# Altium PCB SAAT_PCB.PcbDoc
Units mm, origin at the board's own origin, x right, y up, seen from the top; angles counter-clockwise.
Board outline 229.87 x 73.66 mm, 2 copper layers (Top Layer, Bottom Layer), stack 1.58 mm thick; 83 components, 122 nets, 357 pads, 70 vias.
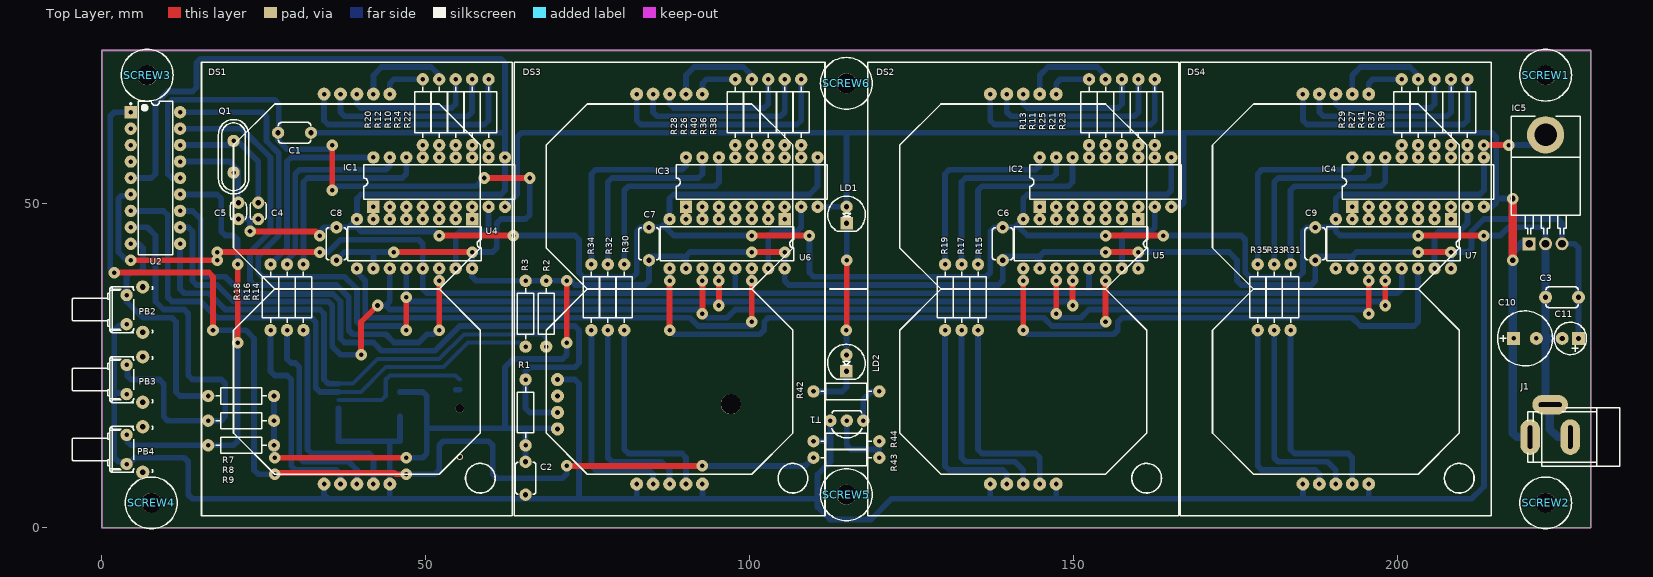
[diagram p0: Top Layer view]
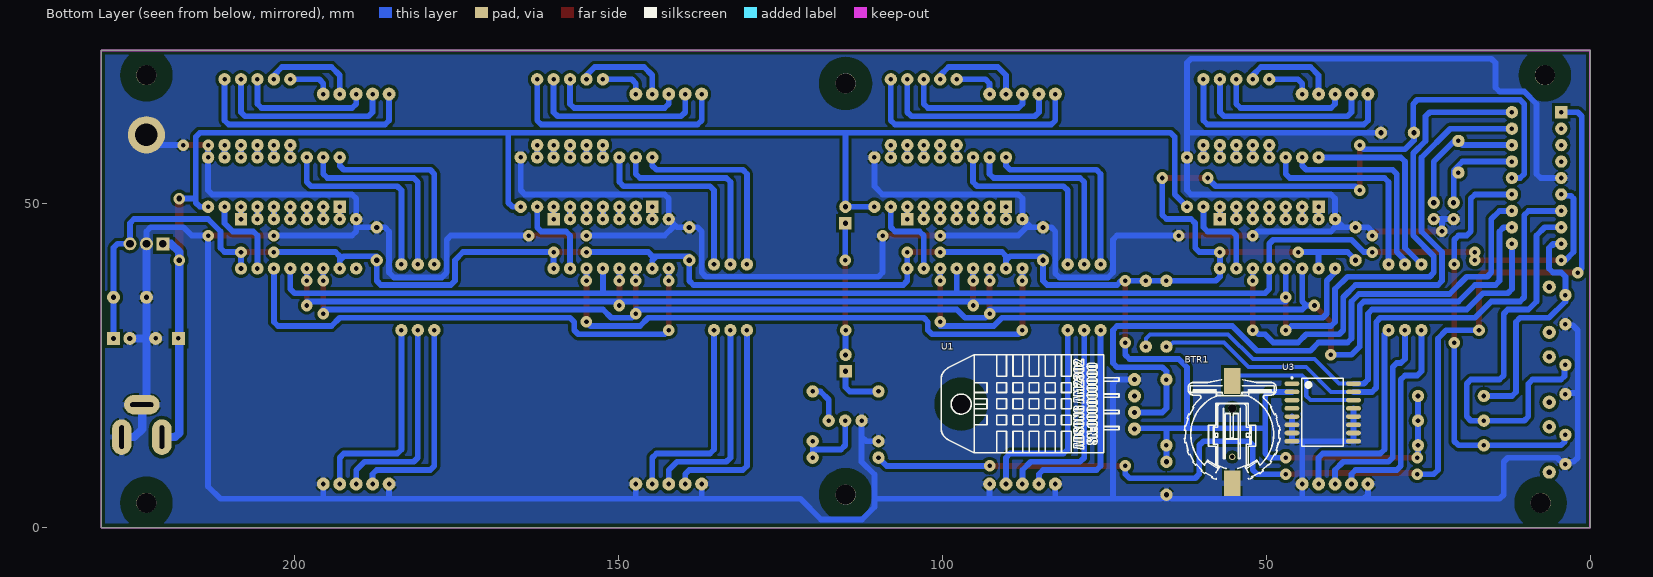
[diagram p1: Bottom Layer view, seen from below]
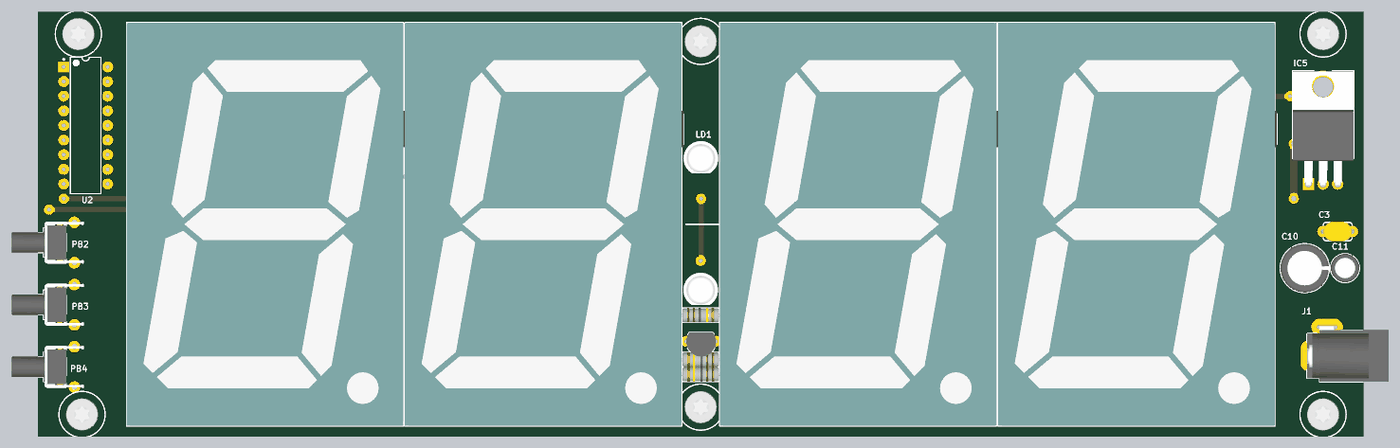
[diagram p2: 3D render of the assembled board from above, using the file's embedded part models]
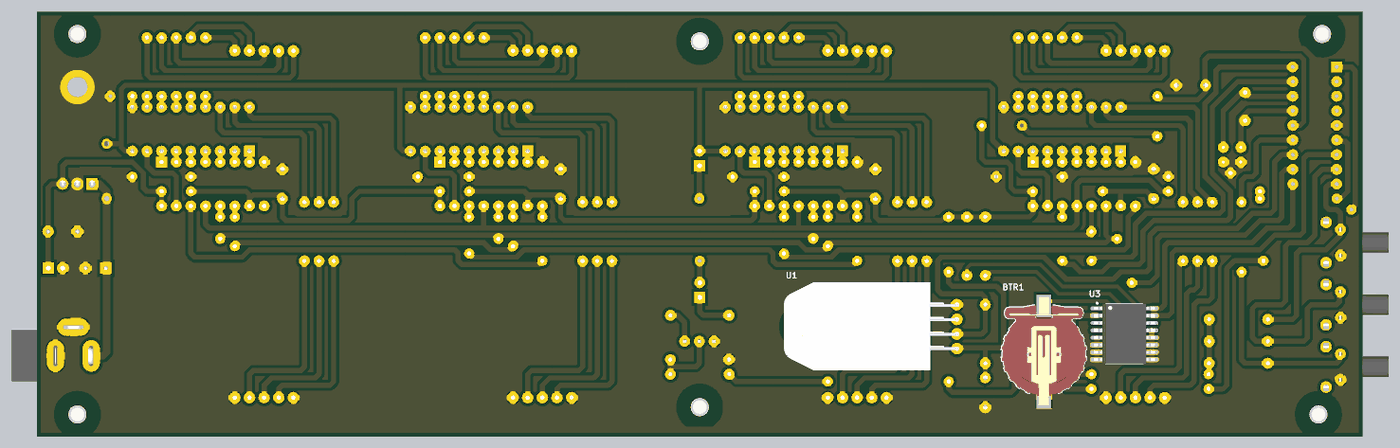
[diagram p3: 3D render of the assembled board from below, using the file's embedded part models]

## Layer stack, top to bottom
Top Solder: solder mask 0.0102, Solder Resist, Dk 3.5
Top Layer: signal copper 0.0356
Dielectric 1: dielectric 1.5086, FR-4, Dk 4.8
Bottom Layer: signal copper 0.0356
Bottom Solder: solder mask 0.0102, Solder Resist, Dk 3.5

## Board outline
0,0 0,73.66 229.87,73.66 229.87,0

## Design rules (kind name [scope] priority, off if disabled: settings)
Clearance Vida [AsMM(PadXSize_AllLayers)=3.1 vs InPolygon] p1: gap=2.54 ignorepadtopadclearanceinfootprint=FALSE
Clearance Polygon [InPolygon] p2: gap=0.508 ignorepadtopadclearanceinfootprint=FALSE
Clearance [All] p3: gap=0.254 ignorepadtopadclearanceinfootprint=FALSE except(0: Arc-Hole Track-Hole SMDPad-Hole THPad-Hole Via-Hole Fill-Hole Poly-Hole Region-Hole Text-Hole)
ComponentClearance [All] p1: gap=-254 collisioncheckmode=3 verticalgap=2540 showdistances=FALSE
HoleSize [All] p1: absolutevalues=TRUE maxlimit=5 minlimit=0.025 maxpercent=80.000 minpercent=20.000
PolygonConnect 7805 [HasFootprint('TO-220-H') vs InNet('GND')] p1: connectstyle=Direct reliefconductorwidth=0.889 reliefentries=4 polygonreliefangle="90 Angle" airgapwidth=0.254
PolygonConnect [All] p2: connectstyle=Relief reliefconductorwidth=0.889 reliefentries=4 polygonreliefangle="90 Angle" airgapwidth=0.254
RoutingVias [All] p1: holewidth=0.9 width=1.778 viastyle="Through Hole" minholewidth=0.9 minwidth=1.778 maxholewidth=0.9 maxwidth=1.778
SolderMaskExpansion [All] p1: expansion=0.102 istentingtop=FALSE
Width [All] p1: maxlimit=7.62 minlimit=0.254 preferedwidth=0.889 minimp=50.000000 maximp=50.000000 favimp=50.000000
28 further rules are at their usual default settings.

## Classes and differential pairs
component class Display: C6 C7 C8 C9 DS1 DS2 DS3 DS4 IC1 IC2 IC3 IC4 LD1 LD2 R10 R11 R12 R13 R14 R15 R16 R17 R18 R19 R20 R21 R22 R23 R24 R25 R26 R27 R28 R29 R30 R31 R32 R33 R34 R35 R36 R37 R38 R39 R40 R41 R42 R43 R44 T1 U4 U5 U6 U7
component class CPU: BTR1 C1 C2 C3 C4 C5 C10 C11 IC5 J1 PB2 PB3 PB4 Q1 R1 R2 R3 R7 R8 R9 SCREW1 SCREW2 SCREW3 SCREW4 SCREW5 SCREW6 U1 U2 U3

## Components (designator, comment, footprint, x,y, rotation, side; value= is the part's Value field where it differs from the comment)
BTR1 "CR2032 Battery" cr1220 55.245,14.415 r270 bottom
C1 "100nF" CAPRR508-350X500X500#1 29.739,60.96 r0 top
C2 "100nF" CAPRR508-350X500X500#1 65.405,7.62 r90 top
C3 "100nF" CAPRR508-350X500X500#2 225.425,35.56 r0 top
C4 "22pF" CAPRR254-254X381X381 24.13,48.895 r90 top
C5 "22pF" CAPRR254-254X381X381 21.061,48.895 r90 top
C6 "100nF" CAPRR508-350X500X500#1 139.065,43.815 r90 top
C7 "100nF" CAPRR508-350X500X500#1 84.455,43.815 r90 top
C8 "100nF" CAPRR508-350X500X500#1 36.195,43.815 r90 top
C9 "100nF" CAPRR508-350X500X500#1 187.325,43.815 r90 top
C10 "470uF" CAPPR350-850X1300 219.71,29.21 r0 top
C11 "47uF" CAPPR250-500X1100 226.695,29.21 r180 top
DS1 "57mm Display" "57mm 7 Segment" 39.37,36.83 r0 top locked
DS2 "57mm Display" "57mm 7 Segment" 142.24,36.83 r0 top locked
DS3 "57mm Display" "57mm 7 Segment" 87.63,36.83 r0 top locked
DS4 "57mm Display" "57mm 7 Segment" 190.5,36.83 r0 top locked
IC1 "UDN2981A-T" DIP18-300 52.07,53.34 r90 top
IC2 "UDN2981A-T" DIP18-300 154.94,53.34 r90 top
IC3 "UDN2981A-T" DIP18-300 100.33,53.34 r90 top
IC4 "UDN2981A-T" DIP18-300 203.2,53.34 r90 top
IC5 "LM7805CT" TO-220-H 222.885,43.815 r0 top
J1 "Jack" CLIFF_FC68148(DC-10A) 226.695,13.97 r90 top
LD1 "IR" LED_VISHAY_TSAL6200 114.97,48.26 r90 top
LD2 "IR" LED_VISHAY_TSAL6200 114.935,25.4 r90 top
PB2 "Push Button" PB_TYCO_1-1825027-1 3.81,33.655 r0 top
PB3 "Push Button" PB_TYCO_1-1825027-1 3.81,22.86 r0 top
PB4 "Push Button" PB_TYCO_1-1825027-1 3.81,12.065 r0 top
Q1 "20MHz" XTAL_HC-49/U 20.32,57.256 r270 top
R1 "4k7" RES1016-630X250 65.405,17.78 r270 top
R2 "10k" RES1016-630X250 68.58,33.02 r90 top
R3 "10k" RES1016-630X250 65.405,33.02 r90 top
R7 "10k" RES1016-630X250 21.484,20.32 r0 top
R8 "10k" RES1016-630X250 21.484,16.51 r0 top
R9 "10k" RES1016-630X250 21.484,12.7 r0 top
R10 "180" RES1016-630X250 52.07,64.135 r90 top
R11 "180" RES1016-630X250 154.94,64.135 r90 top
R12 "180" RES1016-630X250 49.53,64.135 r90 top
R13 "180" RES1016-630X250 152.4,64.135 r90 top
R14 "180" RES1016-630X250 31.115,35.56 r270 top
R15 "180" RES1016-630X250 135.255,35.56 r270 top
R16 "180" RES1016-630X250 28.575,35.56 r270 top
R17 "180" RES1016-630X250 132.715,35.56 r270 top
R18 "180" RES1016-630X250 26.035,35.56 r270 top
R19 "180" RES1016-630X250 130.175,35.56 r270 top
R20 "180" RES1016-630X250 57.15,64.135 r90 top
R21 "180" RES1016-630X250 160.02,64.135 r90 top
R22 "180" RES1016-630X250 59.69,64.135 r90 top
R23 "180" RES1016-630X250 162.56,64.135 r90 top
R24 "360" RES1016-630X250 54.61,64.135 r90 top
R25 "360" RES1016-630X250 157.48,64.135 r90 top
R26 "180" RES1016-630X250 100.33,64.135 r90 top
R27 "180" RES1016-630X250 203.2,64.135 r90 top
R28 "180" RES1016-630X250 97.79,64.135 r90 top
R29 "180" RES1016-630X250 200.66,64.135 r90 top
R30 "180" RES1016-630X250 80.645,35.56 r270 top
R31 "180" RES1016-630X250 183.515,35.56 r270 top
R32 "180" RES1016-630X250 78.105,35.56 r270 top
R33 "180" RES1016-630X250 180.975,35.56 r270 top
R34 "180" RES1016-630X250 75.565,35.56 r270 top
R35 "180" RES1016-630X250 178.435,35.56 r270 top
R36 "180" RES1016-630X250 105.41,64.135 r90 top
R37 "180" RES1016-630X250 208.28,64.135 r90 top
R38 "180" RES1016-630X250 107.95,64.135 r90 top
R39 "180" RES1016-630X250 210.82,64.135 r90 top
R40 "360" RES1016-630X250 102.87,64.135 r90 top
R41 "360" RES1016-630X250 205.74,64.135 r90 top
R42 "11k" RES1016-630X250 114.935,21.025 r180 top
R43 "1k" RES1016-630X250 114.935,10.795 r0 top
R44 "10k" RES1016-630X250 114.935,13.335 r0 top
SCREW1 "M3x6" BOSSARD_BN5687-3061605_v 222.885,69.85 r0 top
SCREW2 "M3x6" BOSSARD_BN5687-3061605_v 222.885,3.81 r0 top
SCREW3 "M3x6" BOSSARD_BN5687-3061605_v 6.985,69.85 r0 top
SCREW4 "M3x6" BOSSARD_BN5687-3061605_v 7.62,3.81 r0 top
SCREW5 "M3x6" BOSSARD_BN5687-3061605_v 114.935,5.08 r0 top
SCREW6 "M3x6" BOSSARD_BN5687-3061605_v 114.935,68.58 r0 top
T1 "BC337" TO-92AA-P254 115.005,16.51 r180 top
U1 "DHT22" DHT22_HOR 83.714,19.05 r90 bottom
U2 "PIC16F88-I/P" PDIP300-P18 8.255,53.975 r0 top
U3 "DS3231" SOIC16W 41.275,17.78 r180 bottom
U4 "M54HC595F1R" DIP16 48.26,43.815 r180 top
U5 "M54HC595F1R" DIP16 151.13,43.815 r180 top
U6 "M54HC595F1R" DIP16 96.52,43.815 r180 top
U7 "M54HC595F1R" DIP16 199.39,43.815 r180 top

## Footprints (in the part's own frame and the unit in brackets; to place one, negate y for a bottom-side part, rotate by r counter-clockwise, add the part's x,y. Pads: shape width x height; smd on the part's side, far side on the other; paste and mask are expansions set on the pad)
"57mm 7 Segment" [mm] "57mm 7 Segment Display"
  round 2 hole 0.7: 1(-5.08,-30.1) 2(-2.54,-30.1) 3(0,-30.1) 4(2.54,-30.1) 5(5.08,-30.1) 6(5.08,30.1) 7(2.54,30.1) 8(0,30.1) 9(-2.54,30.1) 10(-5.08,30.1)
  silkscreen extent -24,-35 24,35, body extent -24,-35 24,35, height 15
BOSSARD_BN5687-3061605_v [mm] "M3 L=6mm Hexalobular Socket Pan Head Screw, Fully Threaded - Stainless Steel A2"
  silkscreen extent -4,-4 4,4, body extent -2.8,-2.8 2.8,2.8, height 2.4
CAPPR250-500X1100 [mm] "Capacitor, Radial, Pin spacing 2.5mm - Body Diameter 5.0mm X Body Height 11mm"
  rect 2x2 hole 0.8: 1(-1.25,0)
  round 2 hole 0.8: 2(1.25,0)
  silkscreen extent -2.5,-2.5 2.5,2.5, body extent -2.51,-2.51 2.49,2.49, height 10.9
CAPPR350-850X1300 [mm] "Capacitor, Radial, Pin spacing 3.5mm - Body Diameter 8.5mm x Body Height 13mm"
  rect 2x2 hole 0.7: 1(-1.75,0)
  round 2 hole 0.7: 2(1.75,0)
  silkscreen extent -4.25,-4.25 4.25,4.25, body extent -4.25,-4.25 4.25,4.25, height 13
CAPRR254-254X381X381 [mm] "Capacitor Radial Rounded, Pin spacing 2.54mm - Body With 2.54mm X Body Length 3.81mm X Body Height 3.81mm"
  round 1.905 hole 0.8: 1(-1.27,0) 2(1.27,0)
  silkscreen extent -1.35,-1.27 1.35,1.27, body extent -1.9,-1.27 1.91,1.27, height 3.81
CAPRR508-350X500X500#1 [mm] "Capacitor Radial Rounded, Pin spacing 5.08mm - Body With 3.2mm X Body Length 5.0mm X Body Height 5.0mm"
  round 1.905 hole 0.8: 1(-2.54,0) 2(2.54,0)
  silkscreen extent -2.5,-1.6 2.5,1.6, body extent -2.79,-1.75 2.79,1.75, height 5
CAPRR508-350X500X500#2 [mm] "Capacitor Radial Rounded, Pin spacing 5.08mm - Body With 3.2mm X Body Length 5.0mm X Body Height 5.0mm"
  round 2 hole 0.8: 1(-2.54,0) 2(2.54,0)
  silkscreen extent -2.5,-1.6 2.5,1.6, body extent -2.79,-1.75 2.79,1.75, height 5
CLIFF_FC68148(DC-10A) [mm] "12V /  5A, 2.1mm Diameter Pin, DC Power Socket With  Switch. DC10A Type"
  rrect100% 5.5x3 hole 0.7 slot 3.6 at 0 deg: 1(0,6.2) 3(0,0)
  rrect100% 3x5.5 hole 0.7 slot 3.6 at 90 deg: 2(5,3.1)
  silkscreen extent -4.5,-7.6 4.5,6.6, body extent -4.5,-7.6 5.2,6.6, height 11
cr1220 [mm]
  rect 4x2.6 smd: 1(-8.23,0) 2(7.57,0)
  round 1.3 hole 1.3: 3(-4,0)
  round 1 hole 0.7: 4(3.5,0)
  silkscreen extent -8.39,-7.38 6.97,7.37, body extent -9.79,-7.34 9.01,7.41, height 4.26
DHT22_HOR [mil] "Dht22 Am2302 Horizontal"
  round 80 hole 30: 1(-150,-526.82) 2(-50,-526.82) 3(50,-526.82) 4(150,-526.82)
  round 122.05 hole 122.05: ""(0.63,526.82)
  silkscreen extent -295,-433 300,649, body extent -300,-536 294,649, height 316
DIP16 [mm] "DIP; 16 Leads; Row Spacing 7.62 mm; Pitch 2.54 mm"
  rect 1.905x1.905 hole 0.7: 1(-8.89,-3.81)
  round 1.905 hole 0.7: 2(-6.35,-3.81) 3(-3.81,-3.81) 4(-1.27,-3.81) 5(1.27,-3.81) 6(3.81,-3.81) 7(6.35,-3.81) 8(8.89,-3.81) 9(8.89,3.81) 10(6.35,3.81) 11(3.81,3.81) 12(1.27,3.81) 13(-1.27,3.81) 14(-3.81,3.81) 15(-6.35,3.81) 16(-8.89,3.81)
  silkscreen extent -10.3,-2.65 10.3,2.65
DIP18-300 [mm] "DIP 18 Leads, Row Spacing 7.62 mm; Pitch 2.54 mm"
  rect 1.905x1.905 hole 0.7: 1(-3.81,10.16)
  round 1.905 hole 0.7: 2(-3.81,7.62) 3(-3.81,5.08) 4(-3.81,2.54) 5(-3.81,0) 6(-3.81,-2.54) 7(-3.81,-5.08) 8(-3.81,-7.62) 9(-3.81,-10.16) 10(3.81,-10.16) 11(3.81,-7.62) 12(3.81,-5.08) 13(3.81,-2.54) 14(3.81,0) 15(3.81,2.54) 16(3.81,5.08) 17(3.81,7.62) 18(3.81,10.16)
  silkscreen extent -2.65,-11.69 2.65,11.69, body extent -3.93,-11.68 3.94,11.69, height 5.33
LED_VISHAY_TSAL6200 [mm] "5mm Infrared Emitting Diode, VISHAY TSAL"
  rect 1.905x1.905 hole 0.8: 1(-1.27,0)
  round 1.905 hole 0.8: 2(1.27,0)
  silkscreen extent -2.5,-2.9 2.9,2.9, body extent -2.5,-2.9 2.9,2.9, height 13.7
PB_TYCO_1-1825027-1 [mm] "Right Angle Micro Miniature Tactile Pushbutton Switche, Round Actuator Length = 5.74mm, FSMRAJ Serie"
  round 1.905 hole 0.7: 1(0,-2.25) 2(0,2.25)
  round 2.032 hole 0.889: 3(2.49,-3.505) 4(2.49,3.505)
  silkscreen extent -8.36,-3.56 4,3.56, body extent -8.36,-4.2 4,4.2, height 7.01
PDIP300-P18 [mm] "DIP, 18-Leads, Row Spacing 7.62mm, Pitch 2.54mm, Body 22.9x6.6mm"
  rect 1.905x1.905 hole 0.7: 1(-3.81,10.16)
  round 1.905 hole 0.7: 2(-3.81,7.62) 3(-3.81,5.08) 4(-3.81,2.54) 5(-3.81,0) 6(-3.81,-2.54) 7(-3.81,-5.08) 8(-3.81,-7.62) 9(-3.81,-10.16) 10(3.81,-10.16) 11(3.81,-7.62) 12(3.81,-5.08) 13(3.81,-2.54) 14(3.81,0) 15(3.81,2.54) 16(3.81,5.08) 17(3.81,7.62) 18(3.81,10.16)
  silkscreen extent -3.93,-11.85 2.65,11.85, body extent -3.6,-11.8 3.6,11.8, height 5.34
RES1016-630X250 [mm] "Resistor, Axial, Pad spacing 10.16 mm - Body Lengh 6.3mm X Body Diameter 2.5mm"
  round 1.905 hole 0.7: 1(-5.08,0) 2(5.08,0)
  silkscreen extent -3.95,-1.25 3.95,1.25, body extent -5.38,-1.27 5.38,1.26, height 2.51
SOIC16W [mm]
  oval 2.3x0.7 smd: 1(-4.75,4.445) 2(-4.75,3.175) 3(-4.75,1.905) 4(-4.75,0.635) 5(-4.75,-0.635) 6(-4.75,-1.905) 7(-4.75,-3.175) 8(-4.75,-4.445) 9(4.75,-4.445) 10(4.75,-3.175) 11(4.75,-1.905) 12(4.75,-0.635) 13(4.75,0.635) 14(4.75,1.905) 15(4.75,3.175) 16(4.75,4.445)
  silkscreen extent -4.87,-5.25 3.2,5.47, body extent -5.31,-5.25 5.32,5.25, height 2.62
TO-92AA-P254 [mm] "TO-92 (TO226), Pitch 2.54mm, Flat Index, 3 In-Line, Bent Leads, Body Dia. 5.3mm"
  round 1.905 hole 0.7: 1(-2.54,0) 2(0,0) 3(2.54,0)
  silkscreen extent -2.36,-1.53 2.37,2.66, body extent -2.81,-1.53 2.81,2.64, height 9.33
TO-220-H [mm] "TO-220 3-Terminal + Tab - Horizontal Mount"
  rect 2x2 hole 1.2: 1(-2.54,0)
  round 2 hole 1.2: 2(0,0) 3(2.54,0)
  round 5.75 hole 3.5: 4(0,16.828)
  silkscreen extent -5.33,1.5 5.33,19.7, body extent -5.27,-0.28 5.27,19.49, height 4.7
XTAL_HC-49/U [mm] "HC-49/U Leaded Cristal, Body 11.05x4.8mm; Pitch 4.88mm"
  round 1.905 hole 0.7: 1(-2.44,0) 2(2.44,0)
  silkscreen extent -5.75,-2.33 5.75,2.33, body extent -5.75,-2.33 5.75,2.33, height 3.5

## Part data
BTR1: library part CR2032
C1 C2 C3 C6 C7 C8 C9: library part CCR_100NF_50V_10%_X7R_508-350X500X500, "Non-polarised capacitor", Case="LS5.08 W3.5 x L5 x H5", Manufacturer=MURATA, Manufacturer Part Number=RPER71H104K2M1A03A, Tolerance=±10%, Voltage=50VDC, Author="CERN DEM JLC", ComponentHeight=5.0mm, Component Type=Standard, CreateDate=28.01.2008, HelpURL=\\cern.ch\dfs\Applications\Altium\Datasheets\CCR_MURATA_RPE.pdf, LatestRevisionDate=3.08.2016, Mounted=Yes, Part Description="Radial Lead Type Monolithic Ceramic Capacitor", Part Number=CCR_100NF_50V_10%_X7R_508-350X500X500, Pin Count=2, Sense=No, SMD=No, Socket=No, Status=Obsolete, Status Comment="Can be replaced by KEMET C322C104K5R5TA", TC=X7R
C4 C5: library part CCR_22PF_100V_5%_C0G_254-254X381X381, "Non-polarised capacitor", Case="LS2.54 W2.54 x L3.81 x H3.81", Manufacturer=AVX, Manufacturer Part Number=SR151A220JAA, Tolerance=±5%, Voltage=100V, Author="CERN DEM JLC", ComponentHeight=3.81mm, Component Type=Standard, CreateDate=16.04.2015, HelpURL=\\cern.ch\dfs\Applications\Altium\Datasheets\CCR_AVX_SR15.pdf, LatestRevisionDate=16.04.2015, Mounted=Yes, Part Description="Radial Lead Type Multilayer Ceramic Capacitor", Part Number=CCR_22PF_100V_5%_C0G_254-254X381X381, Pin Count=2, Sense=No, SMD=No, Socket=No, Status=None, TC=C0G
C10: library part CAER_470UF_16V_20%_LESR0R056_PANASONIC_FR-A, "Polarised capacitor", Case="LS3.5 D8.5 x H13", Manufacturer=PANASONIC, Manufacturer Part Number=EEUFR1C471, Tolerance=±20%, Voltage=16V, Author="CERN DEM JLC", ComponentHeight=13mm, Component Type=Standard, CreateDate=15.06.2010, HelpURL=\\cern.ch\dfs\Applications\Altium\Datasheets\CAER_PANASONIC_FR-A.pdf, LatestRevisionDate=15.06.2010, Mounted=Yes, Part Description="Low ESR 0R056, Radial Lead, Aluminum Electrolytic Capacitor, (FR Series, Type A)", Part Number=CAER_470UF_16V_20%_LESR0R056_PANASONIC_FR-A, Pin Count=2, Sense=No, SMD=No, Socket=No, Status=None
C11: library part CAER_47UF_25V_20%_250-500X1100, "Polarised capacitor", Case="LS2.5 D5 x H11", Manufacturer=GENERIC, Manufacturer1 ComponentHeight=11mm, Manufacturer1 Example=PANASONIC, Manufacturer1 Part Number=EEUFC1E470, Tolerance=±20%, Voltage=25V, Author="CERN DEM JLC", ComponentHeight=11mm, Component Type=Standard, CreateDate=18.12.2007, HelpURL=\\cern.ch\dfs\Applications\Altium\Datasheets\CAER_PANASONIC_FC.pdf, LatestRevisionDate=18.12.2007, Manufacturer Part Number=CAER_47UF_25V_20%_250-500X1100, Mounted=Yes, Part Description="Aluminum Electrolytic Capacitor", Part Number=CAER_47UF_25V_20%_250-500X1100, Pin Count=2, Sense=No, SMD=No, Socket=No, Status=Preferred
DS1 DS2 DS3 DS4: library part "57mm 2.3\" Display"
IC1 IC2 IC3 IC4: "8-Channel Source Drivers", Case=DIP18-300, Manufacturer="ALLEGRO MICROSYSTEM", Author="CERN DEM JLC", Bonding=No, ComponentHeight=5.33mm, Component Type=Standard, CreateDate=7.01.2010, Device=UDN2981A-T, HelpURL=\\cern.ch\dfs\Applications\Altium\Datasheets\UDN2981A-T.pdf, LatestRevisionDate=7.01.2010, Manufacturer Part Number=UDN2981A-T, Mounted=Yes, PackageDescription="DIP 18 Leads, Row Spacing 7.62 mm; Pitch 2.54 mm", Part Description="8-Channel Source Drivers", Part Number=UDN2981A-T, Pin Count=18, PressFit=No, Sense=No, SMD=No, Socket=Yes
IC5: library part LM7805CT_h, "3-Terminal Regulator 1=IN 2=GND 3=OUT 4=GND", Case=TO-220, Manufacturer="FAIRCHILD SEMICONDUCTOR", Author="CERN DEM JLC", Bonding=No, ComponentHeight=4.7mm, Component Type=Standard, CreateDate=18.03.2008, Device=LM7805CT, HelpURL=\\cern.ch\dfs\Applications\Altium\Datasheets\LM7805CT.pdf, LatestRevisionDate=18.03.2008, Manufacturer Part Number=LM7805CT, Mounted=Yes, PackageDescription="TO-220 3-Terminal + Tab - Horizontal Mount", Part Description="3-Terminal 5V 1A Positive Voltage Regulator", Part Number=LM7805CT_h, Pin Count=4, PressFit=No, Sense=No, SMD=No, Socket=No
J1: library part CLIFF_FC68148(DC-10A), "12V /  5A, 2.1mm Diameter Pin, DC Power Socket With  Switch. DC10A Type", Manufacturer="CLIFF ELECTRONIC COMPONENTS", Manufacturer Part Number="FC68148 (DC-10A)", Author="CERN DEM JLC", ComponentHeight=11mm, Component Type=Standard, CreateDate=23.11.2010, Family=Jack, HelpURL=\\cern.ch\dfs\Applications\Altium\Datasheets\CLIFF_FC68148(DC-10A).pdf, LatestRevisionDate=23.11.2010, Mounted=Yes, Part Description="12V/5A, 2.1mm Diameter Pin, DC Power Socket With  Switch (DC10A Type)", Part Number=CLIFF_FC68148(DC-10A), Pin Count=3, PressFit=No, Sense=No, SMD=No, Socket=No, Status=None
LD1 LD2: library part LED_VISHAY_TSAL6200, "LED Infrared Emitting Diode 1C 2A", Manufacturer="VISHAY SEMICONDUCTORS", Manufacturer Part Number=TSAL6200, Author="CERN DEM JMW", Bonding=No, Color=IR, ComponentHeight=13.7mm, Component Type=Standard, CreateDate=10.01.2011, HelpURL=\\cern.ch\dfs\Applications\Altium\Datasheets\LED_VISHAY_TSAL6200.pdf, LatestRevisionDate=10.01.2011, Mounted=Yes, PackageDescription="5mm Infrared Emitting Diode, VISHAY TSAL", Part Description="5mm High Power Infrared Emitting Diode, 940 nm, GaAlAs/GaAs", Part Number=LED_VISHAY_TSAL6200, Pin Count=2, PressFit=No, Sense=No, SMD=No, Socket=No
PB2 PB3 PB4: library part PB_TYCO_1-1825027-1, "Push-Button Switch SPDT", Manufacturer="TYCO ELECTRONICS", Manufacturer Part Number=1-1825027-1, Author="CERN DEM JLC", ComponentHeight=7.01mm, Component Type=Standard, CreateDate=17.04.2013, Family="Push Button", HelpURL=\\cern.ch\dfs\Applications\Altium\Datasheets\PB_TYCO_1-1825027-1.pdf, LatestRevisionDate=28.10.2013, Mounted=Yes, PackageDescription="Right Angle Micro Miniature Tactile Pushbutton Switch, Round Actuator Length = 5.74mm, FSMRAJ Serie", Part Description="Right Angle Micro Miniature Tactile Pushbutton Switch, Round Actuator Length = 5.74mm, FSMRAJ Series", Part Number=PB_TYCO_1-1825027-1, Pin Count=4, PressFit=No, Sense=No, SMD=No, Socket=No, Status=None
Q1: library part XTAL_20MHZ_AEL_HC-49/U, "Quartz Crystal", Manufacturer="AEL CRYSTALS", Manufacturer Part Number=X20M000000L010, Author="CERN DEM JMW", Bonding=No, ComponentHeight=13.6mm, Component Type=Standard, CreateDate=31.10.2008, HelpURL=\\cern.ch\dfs\Applications\Altium\Datasheets\XTAL_AEL_HC-49-U.pdf, LatestRevisionDate=13.05.2011, Mounted=Yes, PackageDescription="HC-49/U Leaded Cristal, Body 11.05x4.8mm; Pitch 4.88mm", Part Description="±30ppm Quartz Crystal Resonator, HC-49/U Type", Part Number=XTAL_20MHZ_AEL_HC-49/U, Pin Count=2, PressFit=No, Sense=No, SMD=No, Socket=No
R1: library part RMF_4K7_1%_0.6W_50PPM_1016-630X250, "Resistor - 1%", Case="LS10.16 L6.3 x D2.5", Manufacturer=GENERIC, Manufacturer1 ComponentHeight=2.5mm, Manufacturer1 Example="VISHAY BEYSCHLAG", Manufacturer1 Part Number=MBB02070C4701FCT00, Power=0.6W, Tolerance=±1%, Author="CERN DEM JLC", ComponentHeight=2.5mm, Component Type=Standard, CreateDate=4.12.2007, HelpURL=\\cern.ch\dfs\Applications\Altium\Datasheets\RMF_VISHAY_MBB0207.pdf, LatestRevisionDate=7.04.2008, Manufacturer Part Number=RMF_4K7_1%_0.6W_50PPM_1016-630X250, Mounted=Yes, Part Description="Leaded Metal Film Resistor", Part Number=RMF_4K7_1%_0.6W_50PPM_1016-630X250, Pin Count=2, PressFit=No, Sense=No, SMD=No, Socket=No, Status=Preferred, TC=±50ppm/°C
R2 R3 R7 R8 R9 R44: library part RMF_10K_1%_0.6W_50PPM_1016-630X250, "Resistor - 1%", Case="LS10.16 L6.3 x D2.5", Manufacturer=GENERIC, Manufacturer1 ComponentHeight=2.5mm, Manufacturer1 Example="VISHAY BEYSCHLAG", Manufacturer1 Part Number=MBB02070C1002FCT00, Power=0.6W, Tolerance=±1%, Author="CERN DEM JLC", ComponentHeight=2.5mm, Component Type=Standard, CreateDate=4.12.2007, HelpURL=\\cern.ch\dfs\Applications\Altium\Datasheets\RMF_VISHAY_MBB0207.pdf, LatestRevisionDate=7.04.2008, Manufacturer Part Number=RMF_10K_1%_0.6W_50PPM_1016-630X250, Mounted=Yes, Part Description="Leaded Metal Film Resistor", Part Number=RMF_10K_1%_0.6W_50PPM_1016-630X250, Pin Count=2, PressFit=No, Sense=No, SMD=No, Socket=No, Status=Preferred, TC=±50ppm/°C
R10 R11 R12 R13 R14 R15 R16 R17 R18 R19 R20 R21 R22 R23 R26 R27 R28 R29 R30 R31 R32 R33 R34 R35 R36 R37 R38 R39: library part RMF_180R_1%_0.6W_50PPM_1016-630X250, "Resistor - 1%", Case="LS10.16 L6.3 x D2.5", Manufacturer=GENERIC, Manufacturer1 ComponentHeight=2.5mm, Manufacturer1 Example="VISHAY BEYSCHLAG", Manufacturer1 Part Number=MBB02070C1800FCT00, Power=0.6W, Tolerance=±1%, Author="CERN DEM JLC", ComponentHeight=2.5mm, Component Type=Standard, CreateDate=4.12.2007, HelpURL=\\cern.ch\dfs\Applications\Altium\Datasheets\RMF_VISHAY_MBB0207.pdf, LatestRevisionDate=7.04.2008, Manufacturer Part Number=RMF_180R_1%_0.6W_50PPM_1016-630X250, Mounted=Yes, Part Description="Leaded Metal Film Resistor", Part Number=RMF_180R_1%_0.6W_50PPM_1016-630X250, Pin Count=2, PressFit=No, Sense=No, SMD=No, Socket=No, Status=Preferred, TC=±50ppm/°C
R24 R25 R40 R41: library part RMF_360R_1%_0.6W_50PPM_1016-630X250, "Resistor - 1%", Case="LS10.16 L6.3 x D2.5", Manufacturer=GENERIC, Manufacturer1 ComponentHeight=2.5mm, Manufacturer1 Example="VISHAY BEYSCHLAG", Manufacturer1 Part Number=MBB02070C3600FCT00, Power=0.6W, Tolerance=±1%, Author="CERN DEM JLC", ComponentHeight=2.5mm, Component Type=Standard, CreateDate=4.12.2007, HelpURL=\\cern.ch\dfs\Applications\Altium\Datasheets\RMF_VISHAY_MBB0207.pdf, LatestRevisionDate=7.04.2008, Manufacturer Part Number=RMF_360R_1%_0.6W_50PPM_1016-630X250, Mounted=Yes, Part Description="Leaded Metal Film Resistor", Part Number=RMF_360R_1%_0.6W_50PPM_1016-630X250, Pin Count=2, PressFit=No, Sense=No, SMD=No, Socket=No, Status=Preferred, TC=±50ppm/°C
R42: library part RMF_11K_1%_0.6W_50PPM_1016-630X250, "Resistor - 1%", Case="LS10.16 L6.3 x D2.5", Manufacturer=GENERIC, Manufacturer1 ComponentHeight=2.5mm, Manufacturer1 Example="VISHAY BEYSCHLAG", Manufacturer1 Part Number=MBB02070C1102FCT00, Power=0.6W, Tolerance=±1%, Author="CERN DEM JLC", ComponentHeight=2.5mm, Component Type=Standard, CreateDate=4.12.2007, HelpURL=\\cern.ch\dfs\Applications\Altium\Datasheets\RMF_VISHAY_MBB0207.pdf, LatestRevisionDate=7.04.2008, Manufacturer Part Number=RMF_11K_1%_0.6W_50PPM_1016-630X250, Mounted=Yes, Part Description="Leaded Metal Film Resistor", Part Number=RMF_11K_1%_0.6W_50PPM_1016-630X250, Pin Count=2, PressFit=No, Sense=No, SMD=No, Socket=No, Status=Preferred, TC=±50ppm/°C
R43: library part RMF_1K_1%_0.6W_50PPM_1016-630X250, "Resistor - 1%", Case="LS10.16 L6.3 x D2.5", Manufacturer=GENERIC, Manufacturer1 ComponentHeight=2.5mm, Manufacturer1 Example="VISHAY BEYSCHLAG", Manufacturer1 Part Number=MBB02070C1001FCT00, Power=0.6W, Tolerance=±1%, Author="CERN DEM JLC", ComponentHeight=2.5mm, Component Type=Standard, CreateDate=4.12.2007, HelpURL=\\cern.ch\dfs\Applications\Altium\Datasheets\RMF_VISHAY_MBB0207.pdf, LatestRevisionDate=7.04.2008, Manufacturer Part Number=RMF_1K_1%_0.6W_50PPM_1016-630X250, Mounted=Yes, Part Description="Leaded Metal Film Resistor", Part Number=RMF_1K_1%_0.6W_50PPM_1016-630X250, Pin Count=2, PressFit=No, Sense=No, SMD=No, Socket=No, Status=Preferred, TC=±50ppm/°C
SCREW1 SCREW2 SCREW3 SCREW4 SCREW5 SCREW6: library part BOSSARD_BN5687-3061605_v, "Screw", Manufacturer=BOSSARD, Manufacturer Part Number="BN5687 Art.3061605", Author="CERN DEM JLC", ComponentHeight=2.4mm, Component Type=Mechanical, CreateDate=15.01.2013, HelpURL=\\cern.ch\dfs\Applications\Altium\Datasheets\BOSSARD_BN5687-3061605.pdf, LatestRevisionDate=15.01.2013, Mounted=Yes, PackageDescription="M3 L=6mm Hexalobular Socket Pan Head Screw, Fully Threaded - Stainless Steel A2", Part Description="M3 L=6mm Hexalobular Socket Pan Head Screw, Fully Threaded, Stainless Steel A2", Part Number=BOSSARD_BN5687-3061605_v, Pin Count=0, PressFit=No, Sense=No, SMD=No, Socket=No, Status=None
T1: "NPN Transistor", Case=TO-92, Manufacturer="FAIRCHILD SEMICONDUCTOR", Author="CERN DEM JLC", Bonding=No, Component Type=Standard, ComponentHeight=7.7mm, CreateDate=18.11.2008, Device=BC337, HelpURL=\\cern.ch\dfs\Applications\Altium\Datasheets\BC337.pdf, LatestRevisionDate=27.08.2014, Manufacturer Part Number=BC337, Mounted=Yes, PackageDescription="TO-92 (TO226), Pitch 2.54mm, Flat Index, 3 In-Line, Bent Leads, Body Dia. 5.3mm", Part Description="45V 800mA NPN Small Signal Transistor", Part Number=BC337, Pin Count=3, PressFit=No, Sense=No, SMD=No, Socket=No, Status=Obsolete
U2: "Enhanced FLASH Microcontroller with nanoWatt Technology, 10-Bit A/D, 4K (x14-Bit words) FLASH, 368 Bytes RAM, 18-Pin PDIP, Standard VDD Range, Industrial Temperature", Supplier Part Number 1=PIC16F88-I/P-ND, Code_JEDEC=MS-001, ComponentLink1Description=Datasheet, ComponentLink1URL=http://ww1.microchip.com/downloads/en/DeviceDoc/30487c.pdf, ComponentLink2Description="Packaging Specification", ComponentLink2URL=http://www.microchip.com/stellent/groups/techpub_sg/documents/packagingspec/en012702.pdf, ComponentLink3Description="Microchip.com Home", ComponentLink3URL=http://www.microchip.com/, DatasheetVersion="revC, Jan-2005", LatestRevisionDate=29-Jan-2009, LatestRevisionNote="Sch. layout revised. 3D Model Removed.", Note="The CCP1 pin is determined by CCPMX in Configuration Word 1 register.", PackageDescription="18-Lead Plastic Dual In-Line (P) - 300 mil Body [PDIP]", PackageReference=PDIP300-P18, PackageVersion="revBB, Aug-2009", Published=11-Oct-2004, Publisher="Altium Limited", Supplier 1=Digi-Key, Supplier 2=Farnell, Supplier 3=Farnell, Supplier Part Number 2=1523967, Supplier Part Number 3=9761500
U4 U5 U6 U7: "8 Bit Shift Register with Output Latches (3 STATE)", ComponentLink1Description="Manufacturer Link", ComponentLink1URL=http://www.st.com/, DatasheetVersion=Apr-1993, LatestRevisionDate=06-Jun-2005, LatestRevisionNote="Stylized 3D Model Added.", PackageDescription="DIP; 16 Leads; Row Spacing 7.62 mm; Pitch 2.54 mm", PackageReference=DIP16, PackageVersion=Apr-1996, Published=8-Jun-2000, Publisher="Altium Limited"

## Free pads (board coordinates)
  round 3.1 hole 3.1: ""(6.985,69.85) ""(7.62,3.81) ""(114.935,5.08) ""(114.935,68.58) ""(222.885,3.81) ""(222.885,69.85)

## Via types
v1: diameter 1.778, hole 0.7, Top Layer to Bottom Layer, 68 vias
v2: diameter 1.778, hole 0.9, Top Layer to Bottom Layer, 2 vias

## Nets (pads, with @x,y where several pads share a name; then routed paths per layer and width w, separated by ;. In a path a pad name is that pad's centre, name@x,y a point inside that pad or via, vN(x,y) a via of type N, cw(c..) or ccw(c..) an arc to the next point about the centre after c; other vN are vias at no path point)
32KHZ: U3.1
+5: C1.1 C2.2 C3.2 C6.1 C7.1 C8.1 C9.1 C11.1 IC5.3 R1.2 R2.2 R3.2 R7.2 R8.2 R9.2 U1.1 U2.14 U3.2 U4.10 U4.16 U5.10 U5.16 U6.10 U6.16 U7.10 U7.16 | length 459.1
  Top Layer w0.889: v1(26.67,10.795) v1(46.99,10.795) ; v1(35.56,52.07) v1(35.56,59.055) ; v1(45.085,42.545) v1(57.15,42.545) ; v1(59.055,53.975) v1(66.04,53.975) ; v1(71.755,28.575) v1(71.755,38.1) ; v1(100.33,42.545) v1(105.41,42.545) ; v1(154.94,42.545) v1(160.02,42.545) ; v1(203.2,42.545) v1(208.28,42.545)
  Bottom Layer w0.889: U2.14 10.795,53.975 10.16,54.61 10.16,65.405 10.795,66.04 26.67,66.04 27.305,65.405 C1.1@27.305,60.96 ; v1@26.564,10.901 R9.2 ; R9.2@26.564,12.806 R8.2 R7.2 ; C1.1 27.199,59.796 28.575,58.42 34.925,58.42 v1(35.56,59.055) ; v1(35.56,52.07) 36.195,52.705 57.785,52.705 v1(59.055,53.975) ; C8.1 37.465,42.545 41.91,42.545 ; U4.10 41.91,42.545 ; v1(45.085,42.545) 41.91,42.545 ; U3.2 49.53,20.955 50.165,20.32 50.165,15.24 ; v1(46.99,10.795) 49.53,10.795 50.165,11.43 50.165,15.24 ; C2.2 R1.2 65.405,15.24 65.299,15.346 ; v1(66.04,53.975) 66.04,48.26 65.405,47.625 61.595,47.625 60.96,46.99 60.96,43.18 60.325,42.545 v1(57.15,42.545) U4.16 57.15,38.735 57.785,38.1 R3.2 R2.2 v1(71.755,38.1) ; U1.1@70.485,15.24 70.379,15.346 65.299,15.346 ; v1(71.755,28.575) 71.755,26.67 71.12,26.035 63.5,26.035 62.23,24.765 62.23,15.346 ; v1@72.39,38.1 73.025,37.465 83.82,37.465 84.455,38.1 C7.1 84.455,41.91 89.535,41.91 90.17,41.275 ; U6.10 90.17,41.275 ; v1(100.33,42.545) 90.805,42.545 90.17,41.91 90.17,41.275 ; v1(105.41,42.545) U6.16 105.41,38.1 106.045,37.465 138.43,37.465 139.065,38.1 C6.1 139.065,41.91 144.145,41.91 ; U5.10 144.78,41.275 144.145,41.91 ; v1(154.94,42.545) 145.415,42.545 144.78,41.91 144.145,41.91 ; U5.16 v1(160.02,42.545) 173.99,42.545 175.26,41.275 175.26,38.1 175.895,37.465 186.69,37.465 187.325,38.1 C9.1 187.325,41.91 192.405,41.91 193.04,41.275 ; U7.10 193.04,41.275 ; v1(203.2,42.545) 193.675,42.545 193.04,41.91 193.04,41.275 ; U7.16 v1(208.28,42.545) 210.82,42.545 211.455,43.18 211.455,45.72 213.36,47.625 224.79,47.625 225.425,46.99 IC5.3 227.33,43.815 227.945,43.2 C11.1 ; 50.165,15.24 50.271,15.346 62.23,15.346 ; 62.23,15.346 65.299,15.346
A0: IC1.14 R10.1 | length 1.9
  Bottom Layer w0.889: IC1.14 R10.1
A1: IC2.14 R11.1 | length 1.9
  Bottom Layer w0.889: IC2.14 R11.1
A2: IC3.14 R26.1 | length 1.9
  Bottom Layer w0.889: IC3.14 R26.1
A3: IC4.14 R27.1 | length 1.9
  Bottom Layer w0.889: IC4.14 R27.1
B0: IC1.15 R12.1 | length 1.9
  Bottom Layer w0.889: IC1.15 R12.1
B1: IC2.15 R13.1 | length 1.9
  Bottom Layer w0.889: IC2.15 R13.1
B2: IC3.15 R28.1 | length 1.9
  Bottom Layer w0.889: IC3.15 R28.1
B3: IC4.15 R29.1 | length 1.9
  Bottom Layer w0.889: IC4.15 R29.1
C0: IC1.16 R14.1 | length 31.6
  Bottom Layer w0.889: R14.1 31.115,53.34 31.75,53.975 46.355,53.975 46.99,54.61 IC1.16
C1: IC2.16 R15.1 | length 29.7
  Bottom Layer w0.889: R15.1@135.255,41.275 135.255,52.07 135.89,52.705 149.225,52.705 149.86,53.34 IC2.16
C2: IC3.16 R30.1 | length 29.7
  Bottom Layer w0.889: R30.1@80.645,41.275 80.645,52.07 81.28,52.705 94.615,52.705 95.25,53.34 IC3.16
C3: IC4.16 R31.1 | length 29.7
  Bottom Layer w0.889: R31.1@183.515,41.275 183.515,52.07 184.15,52.705 197.485,52.705 198.12,53.34 IC4.16
CLK: U2.11 U4.11 U5.11 U6.11 U7.11 | length 236.7
  Top Layer w0.889: v1(40.005,26.67) 40.005,31.75 v1(42.545,34.29) ; v1(92.71,33.02) v1(92.71,38.1) ; v1(147.32,33.02) v1(147.32,38.1) ; v1(195.58,33.02) v1(195.58,38.1)
  Bottom Layer w0.889: U2.11 13.335,46.355 13.97,45.72 13.97,38.1 14.605,37.465 17.78,37.465 20.32,34.925 34.925,34.925 35.56,34.29 35.56,27.94 36.83,26.67 v1(40.005,26.67) ; v1(42.545,34.29) 43.815,34.29 ; U4.11 44.45,34.925 43.815,34.29 ; v1(92.71,38.1) U6.11 ; v1(147.32,38.1) U5.11 ; v1(195.58,33.02) 195.58,33.655 152.4,33.655 151.13,32.385 147.955,32.385 v1(147.32,33.02) 147.32,33.655 97.79,33.655 96.52,32.385 93.345,32.385 v1(92.71,33.02) 92.71,33.655 44.45,33.655 43.815,34.29 ; v1(195.58,38.1) U7.11
D0: IC1.17 R16.1 | length 30.9
  Bottom Layer w0.889: R16.1 28.575,41.275 29.845,42.545 29.845,54.61 30.48,55.245 43.815,55.245 44.45,55.88 IC1.17
D1: IC2.17 R17.1 | length 29.7
  Bottom Layer w0.889: R17.1@132.715,41.275 132.715,53.34 133.35,53.975 146.685,53.975 147.32,54.61 IC2.17
D2: IC3.17 R32.1 | length 29.7
  Bottom Layer w0.889: R32.1@78.105,41.275 78.105,53.34 78.74,53.975 92.075,53.975 92.71,54.61 IC3.17
D3: IC4.17 R33.1 | length 29.7
  Bottom Layer w0.889: R33.1@180.975,41.275 180.975,53.34 181.61,53.975 194.945,53.975 195.58,54.61 IC4.17
DAT: U2.17 U4.14 | length 82.6
  Top Layer w0.889: v1(52.07,30.48) v1(52.07,38.1)
  Bottom Layer w0.889: U2.17 21.59,61.595 26.035,57.15 26.035,45.72 22.86,42.545 22.86,38.1 23.495,37.465 36.195,37.465 38.1,35.56 38.1,30.48 38.735,29.845 43.815,29.845 45.085,28.575 48.895,28.575 50.165,29.845 51.194,29.845 51.829,30.48 v1(52.07,30.48) ; v1(52.07,38.1) U4.14
DHT22: R1.1 U1.2 U2.12 | length 105.3
  Bottom Layer w0.889: U2.12 13.97,48.895 15.24,47.625 15.24,39.37 15.875,38.735 19.05,38.735 21.717,36.068 35.687,36.068 36.83,34.925 36.83,29.21 37.465,28.575 41.91,28.575 43.18,27.305 51.435,27.305 55.245,31.115 73.025,31.115 73.66,30.48 73.66,25.4 73.025,24.765 66.04,24.765 65.405,24.13 R1.1 65.405,18.415 66.04,17.78 U1.2
DOWN: PB3.2 R8.1 U2.8 | length 64.1
  Bottom Layer w0.889: PB3.2 3.965,24.955 3.965,23.381 4.486,22.86 8.89,22.86 9.525,22.225 9.525,17.145 10.16,16.51 R8.1 ; U2.8 6.985,46.355 8.255,45.085 8.255,34.925 9.525,33.655 12.7,33.655 13.335,33.02 13.335,23.495 13.97,22.86 18.415,22.86 19.05,22.225 19.05,17.145 18.415,16.51 R8.1@16.51,16.51
DP0: IC1.13 R24.1 | length 1.9
  Bottom Layer w0.889: IC1.13 R24.1
DP1: IC2.13 R25.1 | length 1.9
  Bottom Layer w0.889: IC2.13 R25.1
DP2: IC3.13 R40.1 | length 1.9
  Bottom Layer w0.889: IC3.13 R40.1
DP3: IC4.13 R41.1 | length 1.9
  Bottom Layer w0.889: IC4.13 R41.1
E0: IC1.18 R18.1 | length 30.5
  Bottom Layer w0.889: R18.1 28.575,43.18 28.575,56.515 29.21,57.15 IC1.18
E1: IC2.18 R19.1 | length 29.7
  Bottom Layer w0.889: R19.1@130.175,41.275 130.175,54.61 130.81,55.245 144.145,55.245 144.78,55.88 IC2.18
E2: IC3.18 R34.1 | length 29.7
  Bottom Layer w0.889: R34.1@75.565,41.275 75.565,54.61 76.2,55.245 89.535,55.245 90.17,55.88 IC3.18
E3: IC4.18 R35.1 | length 29.7
  Bottom Layer w0.889: R35.1@178.435,41.275 178.435,54.61 179.07,55.245 192.405,55.245 193.04,55.88 IC4.18
F0: IC1.12 R20.1 | length 1.9
  Bottom Layer w0.889: IC1.12 R20.1
F1: IC2.12 R21.1 | length 1.9
  Bottom Layer w0.889: IC2.12 R21.1
F2: IC3.12 R36.1 | length 1.9
  Bottom Layer w0.889: IC3.12 R36.1
F3: IC4.12 R37.1 | length 1.9
  Bottom Layer w0.889: IC4.12 R37.1
G0: IC1.11 R22.1 | length 1.9
  Bottom Layer w0.889: IC1.11 R22.1
G1: IC2.11 R23.1 | length 1.9
  Bottom Layer w0.889: IC2.11 R23.1
G2: IC3.11 R38.1 | length 1.9
  Bottom Layer w0.889: IC3.11 R38.1
G3: IC4.11 R39.1 | length 1.9
  Bottom Layer w0.889: IC4.11 R39.1
GND: BTR1.2 C1.2 C2.1 C3.1 C4.1 C5.1 C6.2 C7.2 C8.2 C9.2 C10.2 C11.2 DS1.1 DS1.5 DS2.1 DS2.5 DS3.1 DS3.5 DS4.1 DS4.5 IC1.10 IC2.10 IC3.10 IC4.10 IC5.2 IC5.4 J1.2 J1.3 PB2.1 PB3.1 PB4.1 R44.1 T1.3 U1.4 U2.5 U3.5 U3.6 U3.7 U3.8 U3.9 U3.10 U3.11 U3.12 U3.13 U4.8 U5.8 U6.8 U7.8 | length 912.1
  Top Layer w0.889: v1(22.86,45.72) 33.02,45.72 v1(33.655,45.085) ; v1(52.07,45.085) v1(63.5,45.085) ; v1(100.33,45.085) v1(109.22,45.085) ; v1(154.94,45.085) v1(163.83,45.085) ; v1(203.2,45.085) v1(213.36,45.085) ; v1(213.36,59.055) v1(217.17,59.055)
  Bottom Layer w0.889: PB4.1@3.7,9.705 3.81,9.596 PB4.1@3.81,9.525 ; PB3.1 3.655,20.765 2.095,20.765 1.905,20.955 ; PB2.1 3.655,31.25 2.675,31.25 1.905,30.48 1.905,20.955 ; U2.5 7.62,53.975 8.255,54.61 8.255,65.405 10.16,67.31 13.97,67.31 14.605,67.945 14.605,71.755 15.24,72.39 61.595,72.39 62.23,71.755 62.23,60.96 ; C5.1 22.86,47.625 ; v1(22.86,45.72) 22.86,47.625 ; C4.1 22.86,47.625 ; C1.2 62.23,60.96 ; v1(33.655,45.085) 33.655,45.72 34.29,46.355 C8.2 38.1,46.355 ; DS1.1 34.29,5.08 34.925,4.445 ; U3.9 44.45,13.335 ; U3.9@36.525,13.665 U3.10 U3.11 U3.12 U3.13 ; U3.8 44.45,13.335 ; U3.8@46.025,13.665 U3.7 U3.6 U3.5 ; v1(52.07,45.085) 51.435,45.72 40.005,45.72 39.37,46.355 38.1,46.355 ; v1(63.5,45.085) 73.025,45.085 73.66,44.45 73.66,39.37 74.422,38.608 81.915,38.608 82.55,39.243 82.55,45.72 83.185,46.355 C7.2 86.36,46.355 ; U1.4 73.025,22.86 73.66,22.225 73.66,4.445 ; DS3.1 82.55,4.445 ; DS3.5 92.71,4.445 ; v1(100.33,45.085) 88.265,45.085 86.995,46.355 86.36,46.355 ; v1(109.22,45.085) 109.22,39.37 109.855,38.735 136.525,38.735 137.16,39.37 137.16,45.72 137.795,46.355 C6.2 140.97,46.355 U5.8@141.605,46.99 ; R44.1 111.76,13.335 112.465,14.04 ; IC3.10 110.49,52.705 109.22,51.435 88.265,51.435 87.63,50.8 U6.8 86.36,46.355 ; T1.3 112.465,14.04 ; DS2.1 137.16,4.445 ; DS2.5 147.32,4.445 ; v1(154.94,45.085) 142.875,45.085 141.605,46.355 U5.8@141.605,46.99 ; v1(163.83,45.085) 175.895,45.085 176.53,44.45 176.53,39.37 177.292,38.608 184.658,38.608 185.42,39.37 185.42,45.72 186.055,46.355 C9.2 190.5,46.355 ; IC2.10 165.1,52.07 164.465,51.435 142.875,51.435 142.24,50.8 U5.8 U5.8@141.605,46.99 ; DS4.1 185.42,4.445 ; DS4.5 195.58,4.445 ; v1(203.2,45.085) 191.135,45.085 190.5,45.72 190.5,46.355 ; v1(213.36,59.055) IC4.10 213.36,52.07 212.725,51.435 191.135,51.435 190.5,50.8 U7.8 190.5,46.355 ; v1(217.17,59.055) IC5.4@221.615,59.055 ; IC5.2 222.885,45.72 222.25,46.355 217.17,46.355 215.9,45.085 v1(213.36,45.085) 213.36,6.35 211.455,4.445 195.58,4.445 ; 1.905,20.955 1.905,10.795 2.54,10.16 4.445,10.16 5.08,10.795 12.7,10.795 13.335,10.16 13.335,5.08 13.97,4.445 34.925,4.445 ; 34.925,4.445 44.45,4.445 ; 38.1,46.355 U4.8 39.37,50.8 40.005,51.435 61.595,51.435 62.23,52.07 IC1.10 62.23,60.96 ; 44.45,4.445 73.66,4.445 ; 44.45,4.445 DS1.5 44.45,13.335 ; 73.66,4.445 82.55,4.445 ; 82.55,4.445 92.71,4.445 ; 92.71,4.445 110.49,4.445 ; 110.49,4.445 110.49,8.185 112.465,10.16 112.465,14.04 ; 110.49,4.445 110.49,3.175 112.395,1.27 118.745,1.27 121.92,4.445 137.16,4.445 ; 137.16,4.445 147.32,4.445 ; 147.32,4.445 185.42,4.445 ; 185.42,4.445 195.58,4.445
  Bottom Layer w1.27: C10.2@221.615,29.21 222.885,29.21 ; J1.2@222.885,19.05 222.885,29.21 ; IC5.2 222.885,29.21 ; J1.2@223.52,19.05 223.52,15.24 224.79,13.97 J1.3 ; C11.2 222.885,29.21
LD: U2.18 U4.12 U5.12 U6.12 U7.12 | length 249.7
  Top Layer w0.889: v1(46.99,30.48) v1(46.99,35.56) ; v1(95.25,34.29) v1(95.25,38.1) ; v1(149.86,34.29) v1(149.86,38.1) ; v1(198.12,34.29) v1(198.12,38.1)
  Bottom Layer w0.889: U2.18 24.765,64.135 25.4,63.5 25.4,59.69 27.305,57.785 27.305,45.085 24.13,41.91 24.13,39.37 24.765,38.735 37.465,38.735 39.37,36.83 39.37,31.75 40.005,31.115 46.114,31.115 46.749,30.48 v1(46.99,30.48) ; U4.12 v1(46.99,35.56) 46.99,34.925 v1@95.25,34.925 ; v1(95.25,34.29) v1@95.25,34.925 ; v1(95.25,38.1) U6.12 ; v1(149.86,34.29) v1@149.86,34.925 ; v1(149.86,38.1) U5.12 ; v1(198.12,34.29) 198.12,34.925 v1@149.86,34.925 ; v1(198.12,38.1) U7.12 ; v1@95.25,34.925 v1@149.86,34.925
LED: R43.1 U2.1 | length 176.9
  Top Layer w0.889: v1(1.905,39.37) 16.51,39.37 17.145,38.735 v1(17.145,30.48) ; v1(26.67,8.255) 26.844,8.429 45.154,8.429 45.327,8.255 v1(46.99,8.255) ; v1(71.755,9.525) v1(92.71,9.525)
  Bottom Layer w0.889: v1(1.905,39.37) 1.27,40.005 1.27,63.5 1.905,64.135 U2.1 ; v1(17.145,30.48) 22.225,30.48 23.495,29.21 23.495,8.89 24.13,8.255 v1(26.67,8.255) ; v1(46.99,8.255) 51.435,8.255 52.07,8.89 52.07,12.7 52.705,13.335 59.69,13.335 60.325,12.7 60.325,8.255 60.96,7.62 71.12,7.62 71.755,8.255 v1(71.755,9.525) ; v1(92.71,9.525) 108.585,9.525 R43.1
MODE: PB4.2 R9.1 U2.13 | length 64.5
  Top Layer w0.889: v1(20.955,28.575) v1(20.955,40.64)
  Bottom Layer w0.889: PB4.2 3.965,14.16 3.965,13.221 4.486,12.7 R9.1 20.32,12.7 20.955,13.335 v1(20.955,28.575) ; U2.13 17.78,51.435 18.415,50.8 18.415,45.72 19.05,45.085 20.32,45.085 20.955,44.45 v1(20.955,40.64)
NetBTR1_+: BTR1.1 U3.14 | length 22.7
  Bottom Layer w0.635: U3.14 43.18,19.685 43.815,20.32 43.815,22.86 44.45,23.495 54.61,23.495 BTR1.1@55.245,22.86
  Bottom Layer w0.889: BTR1.1@54.61,21.294 BTR1.1@55.245,21.294
NetDS1_2: DS1.2 R18.2 | length 33.1
  Bottom Layer w0.889: R18.2 26.035,24.13 26.67,23.495 28.575,23.495 29.21,22.86 29.21,9.525 29.845,8.89 36.195,8.89 36.83,8.255 DS1.2
NetDS1_3: DS1.3 R16.2 | length 32.7
  Bottom Layer w0.889: R16.2 28.575,26.035 29.21,25.4 29.845,25.4 30.48,24.765 30.48,10.795 31.115,10.16 38.1,10.16 39.37,8.89 DS1.3
NetDS1_4: DS1.4 R14.2 | length 33.4
  Bottom Layer w0.889: R14.2 31.75,29.845 31.75,12.065 32.385,11.43 41.275,11.43 41.91,10.795 DS1.4
NetDS1_6: DS1.6 R12.2 | length 7
  Bottom Layer w0.889: DS1.6 44.45,68.58 45.085,69.215 R12.2
NetDS1_7: DS1.7 R10.2 | length 14.8
  Bottom Layer w0.889: DS1.7 41.91,69.85 43.18,71.12 50.8,71.12 52.07,69.85 R10.2
NetDS1_8: DS1.8 R24.2 | length 21.1
  Bottom Layer w0.889: DS1.8 39.37,65.405 40.005,64.77 53.975,64.77 54.61,65.405 R24.2
NetDS1_9: DS1.9 R20.2 | length 28.7
  Bottom Layer w0.889: DS1.9 36.83,64.135 37.465,63.5 56.515,63.5 57.15,64.135 R20.2
NetDS1_10: DS1.10 R22.2 | length 36.3
  Bottom Layer w0.889: DS1.10 34.29,62.865 34.925,62.23 59.055,62.23 59.69,62.865 R22.2
NetDS2_2: DS2.2 R19.2 | length 32.5
  Bottom Layer w0.889: R19.2 130.175,9.525 130.81,8.89 139.065,8.89 139.7,8.255 DS2.2
NetDS2_3: DS2.3 R17.2 | length 32.2
  Bottom Layer w0.889: R17.2 132.715,10.795 133.35,10.16 140.97,10.16 142.24,8.89 DS2.3
NetDS2_4: DS2.4 R15.2 | length 32.5
  Bottom Layer w0.889: R15.2 135.255,12.065 135.89,11.43 144.145,11.43 144.78,10.795 DS2.4
NetDS2_6: DS2.6 R13.2 | length 7
  Bottom Layer w0.889: DS2.6 147.32,68.58 147.955,69.215 R13.2
NetDS2_7: DS2.7 R11.2 | length 14.8
  Bottom Layer w0.889: DS2.7 144.78,69.85 146.05,71.12 153.67,71.12 154.94,69.85 R11.2
NetDS2_8: DS2.8 R25.2 | length 21.1
  Bottom Layer w0.889: DS2.8 142.24,65.405 142.875,64.77 156.845,64.77 157.48,65.405 R25.2
NetDS2_9: DS2.9 R21.2 | length 28.7
  Bottom Layer w0.889: DS2.9 139.7,64.135 140.335,63.5 159.385,63.5 160.02,64.135 R21.2
NetDS2_10: DS2.10 R23.2 | length 36.3
  Bottom Layer w0.889: DS2.10 137.16,62.865 137.795,62.23 161.925,62.23 162.56,62.865 R23.2
NetDS3_2: DS3.2 R34.2 | length 32.5
  Bottom Layer w0.889: R34.2 75.565,9.525 76.2,8.89 84.455,8.89 85.09,8.255 DS3.2
NetDS3_3: DS3.3 R32.2 | length 32.2
  Bottom Layer w0.889: R32.2 78.105,10.795 78.74,10.16 86.36,10.16 87.63,8.89 DS3.3
NetDS3_4: DS3.4 R30.2 | length 32.5
  Bottom Layer w0.889: R30.2 80.645,12.065 81.28,11.43 89.535,11.43 90.17,10.795 DS3.4
NetDS3_6: DS3.6 R28.2 | length 7
  Bottom Layer w0.889: DS3.6 92.71,68.58 93.345,69.215 R28.2
NetDS3_7: DS3.7 R26.2 | length 14.8
  Bottom Layer w0.889: DS3.7 90.17,69.85 91.44,71.12 99.06,71.12 100.33,69.85 R26.2
NetDS3_8: DS3.8 R40.2 | length 21.1
  Bottom Layer w0.889: DS3.8 87.63,65.405 88.265,64.77 102.235,64.77 102.87,65.405 R40.2
NetDS3_9: DS3.9 R36.2 | length 28.7
  Bottom Layer w0.889: DS3.9 85.09,64.135 85.725,63.5 104.775,63.5 105.41,64.135 R36.2
NetDS3_10: DS3.10 R38.2 | length 36.3
  Bottom Layer w0.889: DS3.10 82.55,62.865 83.185,62.23 107.315,62.23 107.95,62.865 R38.2
NetDS4_2: DS4.2 R35.2 | length 32.5
  Bottom Layer w0.889: R35.2 178.435,9.525 179.07,8.89 187.325,8.89 187.96,8.255 DS4.2
NetDS4_3: DS4.3 R33.2 | length 32.2
  Bottom Layer w0.889: R33.2 180.975,10.795 181.61,10.16 189.23,10.16 190.5,8.89 DS4.3
NetDS4_4: DS4.4 R31.2 | length 32.5
  Bottom Layer w0.889: R31.2 183.515,12.065 184.15,11.43 192.405,11.43 193.04,10.795 DS4.4
NetDS4_6: DS4.6 R29.2 | length 7
  Bottom Layer w0.889: DS4.6 195.58,68.58 196.215,69.215 R29.2
NetDS4_7: DS4.7 R27.2 | length 14.8
  Bottom Layer w0.889: DS4.7 193.04,69.85 194.31,71.12 201.93,71.12 203.2,69.85 R27.2
NetDS4_8: DS4.8 R41.2 | length 21.1
  Bottom Layer w0.889: DS4.8 190.5,65.405 191.135,64.77 205.105,64.77 205.74,65.405 R41.2
NetDS4_9: DS4.9 R37.2 | length 28.7
  Bottom Layer w0.889: DS4.9 187.96,64.135 188.595,63.5 207.645,63.5 208.28,64.135 R37.2
NetDS4_10: DS4.10 R39.2 | length 36.3
  Bottom Layer w0.889: DS4.10 185.42,62.865 186.055,62.23 210.185,62.23 210.82,62.865 R39.2
NetLD1_1: LD1.1 LD2.2 | length 19.7
  Top Layer w0.889: v1(114.935,30.48) 115.005,30.55 v1(115.005,41.275)
  Bottom Layer w0.889: LD2.2 v1@114.935,29.81 ; LD1.1 114.935,46.955 115.005,46.885 v1(115.005,41.275)
NetLD2_1: LD2.1 R42.2 | length 7.8
  Bottom Layer w0.889: R42.2 114.3,21.025 114.935,21.66 LD2.1
NetR42_1: R42.1 T1.1 | length 6.2
  Bottom Layer w0.889: T1.1 117.545,19.755 118.815,21.025 R42.1
NetR43_2: R43.2 R44.2 T1.2 | length 11
  Bottom Layer w0.889: T1.2 115.005,12.7 115.64,12.065 120.015,12.065 ; R43.2 120.015,12.065 ; R44.2@120.015,12.7 120.015,12.065
NetU4_1: IC1.7 U4.1 | length 1.9
  Bottom Layer w0.889: U4.1 IC1.7
NetU4_2: IC1.6 U4.2 | length 1.9
  Bottom Layer w0.889: U4.2 IC1.6
NetU4_3: IC1.5 U4.3 | length 1.9
  Bottom Layer w0.889: U4.3 IC1.5
NetU4_4: IC1.4 U4.4 | length 1.9
  Bottom Layer w0.889: U4.4 IC1.4
NetU4_5: IC1.3 U4.5 | length 1.9
  Bottom Layer w0.889: U4.5 IC1.3
NetU4_6: IC1.2 U4.6 | length 1.9
  Bottom Layer w0.889: U4.6 IC1.2
NetU4_7: IC1.1 U4.7 | length 1.9
  Bottom Layer w0.889: U4.7 IC1.1
NetU4_15: IC1.8 U4.15 | length 13.9
  Bottom Layer w0.889: U4.15 54.61,45.085 55.245,45.72 59.055,45.72 59.69,46.355 IC1.8
NetU5_1: IC2.7 U5.1 | length 1.9
  Bottom Layer w0.889: U5.1 IC2.7
NetU5_2: IC2.6 U5.2 | length 1.9
  Bottom Layer w0.889: U5.2 IC2.6
NetU5_3: IC2.5 U5.3 | length 1.9
  Bottom Layer w0.889: U5.3 IC2.5
NetU5_4: IC2.4 U5.4 | length 1.9
  Bottom Layer w0.889: U5.4 IC2.4
NetU5_5: IC2.3 U5.5 | length 1.9
  Bottom Layer w0.889: U5.5 IC2.3
NetU5_6: IC2.2 U5.6 | length 1.9
  Bottom Layer w0.889: U5.6 IC2.2
NetU5_7: IC2.1 U5.7 | length 1.9
  Bottom Layer w0.889: U5.7 IC2.1
NetU5_15: IC2.8 U5.15 | length 13.9
  Bottom Layer w0.889: U5.15 157.48,45.085 158.115,45.72 161.925,45.72 162.56,46.355 IC2.8
NetU6_1: IC3.7 U6.1 | length 1.9
  Bottom Layer w0.889: U6.1 IC3.7
NetU6_2: IC3.6 U6.2 | length 1.9
  Bottom Layer w0.889: U6.2 IC3.6
NetU6_3: IC3.5 U6.3 | length 1.9
  Bottom Layer w0.889: U6.3 IC3.5
NetU6_4: IC3.4 U6.4 | length 1.9
  Bottom Layer w0.889: U6.4 IC3.4
NetU6_5: IC3.3 U6.5 | length 1.9
  Bottom Layer w0.889: U6.5 IC3.3
NetU6_6: IC3.2 U6.6 | length 1.9
  Bottom Layer w0.889: U6.6 IC3.2
NetU6_7: IC3.1 U6.7 | length 1.9
  Bottom Layer w0.889: U6.7 IC3.1
NetU6_15: IC3.8 U6.15 | length 13.9
  Bottom Layer w0.889: U6.15 102.87,45.085 103.505,45.72 107.315,45.72 107.95,46.355 IC3.8
NetU7_1: IC4.7 U7.1 | length 1.9
  Bottom Layer w0.889: U7.1 IC4.7
NetU7_2: IC4.6 U7.2 | length 1.9
  Bottom Layer w0.889: U7.2 IC4.6
NetU7_3: IC4.5 U7.3 | length 1.9
  Bottom Layer w0.889: U7.3 IC4.5
NetU7_4: IC4.4 U7.4 | length 1.9
  Bottom Layer w0.889: U7.4 IC4.4
NetU7_5: IC4.3 U7.5 | length 1.9
  Bottom Layer w0.889: U7.5 IC4.3
NetU7_6: IC4.2 U7.6 | length 1.9
  Bottom Layer w0.889: U7.6 IC4.2
NetU7_7: IC4.1 U7.7 | length 1.9
  Bottom Layer w0.889: U7.7 IC4.1
NetU7_15: IC4.8 U7.15 | length 13.5
  Bottom Layer w0.889: U7.15 205.74,45.085 206.375,45.72 209.55,45.72 210.82,46.99 IC4.8
OE: U2.6 U4.13 U5.13 U6.13 U7.13 | length 229.7
  Top Layer w0.889: v1(4.445,41.275) v1(17.78,41.275) ; v1(17.78,42.545) v1(33.655,42.545)
  Bottom Layer w0.889: v1(4.445,41.275) 3.81,41.275 2.54,42.545 2.54,50.8 2.981,51.241 4.251,51.241 U2.6 ; v1(17.78,41.275) v1(17.78,42.545) ; v1(33.655,42.545) 34.925,42.545 36.83,44.45 48.895,44.45 49.53,43.815 U4.13 49.53,36.83 50.165,36.195 97.79,36.195 ; U6.13 97.79,36.195 ; U5.13 152.4,36.195 ; U7.13 200.66,36.83 200.025,36.195 152.4,36.195 ; 97.79,36.195 152.4,36.195
OSC1: C4.2 Q1.1 U2.16 | length 20
  Bottom Layer w0.889: U2.16 19.685,59.055 20.32,59.69 20.955,59.69 24.13,56.515 C4.2
OSC2: C5.2 Q1.2 U2.15 | length 14.5
  Bottom Layer w0.889: U2.15 19.685,56.515 21.061,55.139 C5.2
Q1: U4.9 U6.14 | length 76.9
  Top Layer w0.889: v1(100.33,31.75) v1(100.33,38.1)
  Bottom Layer w0.889: U4.9 39.37,39.37 40.64,38.1 40.64,33.02 41.275,32.385 90.805,32.385 92.075,31.115 100.33,31.115 v1(100.33,31.75) ; v1(100.33,38.1) U6.14
Q2: U5.14 U6.9 | length 87.9
  Top Layer w0.889: v1(87.63,30.48) v1(87.63,38.1) ; v1(154.94,31.75) v1(154.94,38.1)
  Bottom Layer w0.889: v1(87.63,30.48) 88.265,29.845 101.6,29.845 102.235,30.48 102.235,31.75 102.87,32.385 145.415,32.385 146.685,31.115 154.305,31.115 v1(154.94,31.75) ; v1(87.63,38.1) U6.9 ; v1(154.94,38.1) U5.14
Q3: U5.9 U7.14 | length 81.6
  Top Layer w0.889: v1(142.24,30.48) v1(142.24,38.1)
  Bottom Layer w0.889: v1(142.24,30.48) 142.875,29.845 156.21,29.845 156.845,30.48 156.845,31.75 157.48,32.385 193.04,32.385 194.31,31.115 202.565,31.115 203.2,31.75 U7.14 ; v1(142.24,38.1) U5.9
SCL: R2.1 U2.10 U3.16 | length 80.2
  Bottom Layer w0.61: U3.16 38.735,22.225 42.545,26.035 52.07,26.035 55.88,29.845 67.945,29.845 68.58,29.21 R2.1
  Bottom Layer w0.889: U2.10 12.065,36.83 12.7,36.195 16.51,36.195 19.05,33.655 33.655,33.655 34.29,33.02 34.29,22.86 34.925,22.225 U3.16
SDA: R3.1 U2.7 U3.15 | length 89.3
  Bottom Layer w0.61: U3.15 40.005,20.955 43.815,24.765 52.705,24.765 56.515,28.575 64.419,28.575 65.054,27.94 R3.1
  Bottom Layer w0.889: U2.7 9.525,48.895 10.16,48.26 10.16,35.56 10.795,34.925 15.24,34.925 17.78,32.385 32.385,32.385 33.02,31.75 33.02,21.59 33.655,20.955 U3.15
SQW: U3.3
UP: PB2.2 R7.1 U2.9 | length 37.1
  Bottom Layer w0.889: U2.9 5.715,43.815 ; 5.715,43.621 5.909,43.621 6.35,43.18 6.35,40.005 5.715,39.37 4.445,39.37 3.81,38.735 PB2.2 3.81,34.925 6.35,32.385 10.795,32.385 11.43,31.75 11.43,20.955 12.065,20.32 R7.1
VCC: C10.1 IC1.9 IC2.9 IC3.9 IC4.9 IC5.1 J1.1 LD1.2 | length 249.9
  Top Layer w1.27: v2(217.805,41.275) v2(217.805,50.8)
  Bottom Layer w0.889: IC1.9 64.135,51.435 64.135,60.325 64.77,60.96 167.005,60.96 ; IC3.9 LD1.2 114.97,60.36 ; IC2.9 166.37,49.53 167.005,50.165 167.005,60.96 ; IC4.9 214.63,49.53 215.265,50.165 215.265,50.8 ; v2(217.805,50.8) 215.265,50.8 ; 167.005,60.96 214.63,60.96 215.265,60.325 215.265,50.8
  Bottom Layer w1.27: IC5.1 219.075,43.815 217.805,42.545 v2(217.805,41.275) 217.805,14.605 218.44,13.97 J1.1
pads on no net: BTR1.3 BTR1.4 PB2.3 PB2.4 PB3.3 PB3.4 PB4.3 PB4.4 U1. U1.3 U2.2 U2.3 U2.4 U3.4 U7.9

## Polygon pours and split planes (outlines as drawn)
GND on Bottom Layer "GND_L02_P001" (solid, pour order 1): 0,0 0,73.66 229.87,73.66 229.87,0

## Keep-outs
Keep-Out Layer:
  the board outline again, w0.254

## Silkscreen, mask and mechanical layers (free items; w line width, h text height)
Top Overlay:
  lines w0.254: 112.395,36.83 118.11,36.83

## Text inside footprints (layer, text, board x,y; h text height)
LD1: Mechanical 8 "A" at 113.97,49.173 h1.02 r90; Mechanical 8 "C" at 113.97,46.609 h1.02 r90
LD2: Mechanical 8 "A" at 113.935,26.313 h1.02 r90; Mechanical 8 "C" at 113.935,23.749 h1.02 r90